# Altium PCB ExchangeDisplay.PcbDoc (part 3 of 3)
Units mil, origin at the board's own origin, x right, y up, seen from the top; angles counter-clockwise.
Board outline 17200 x 6515 mil, 2 copper layers (Top Layer, Bottom Layer); 256 components, 104 nets, 649 pads, 121 vias.
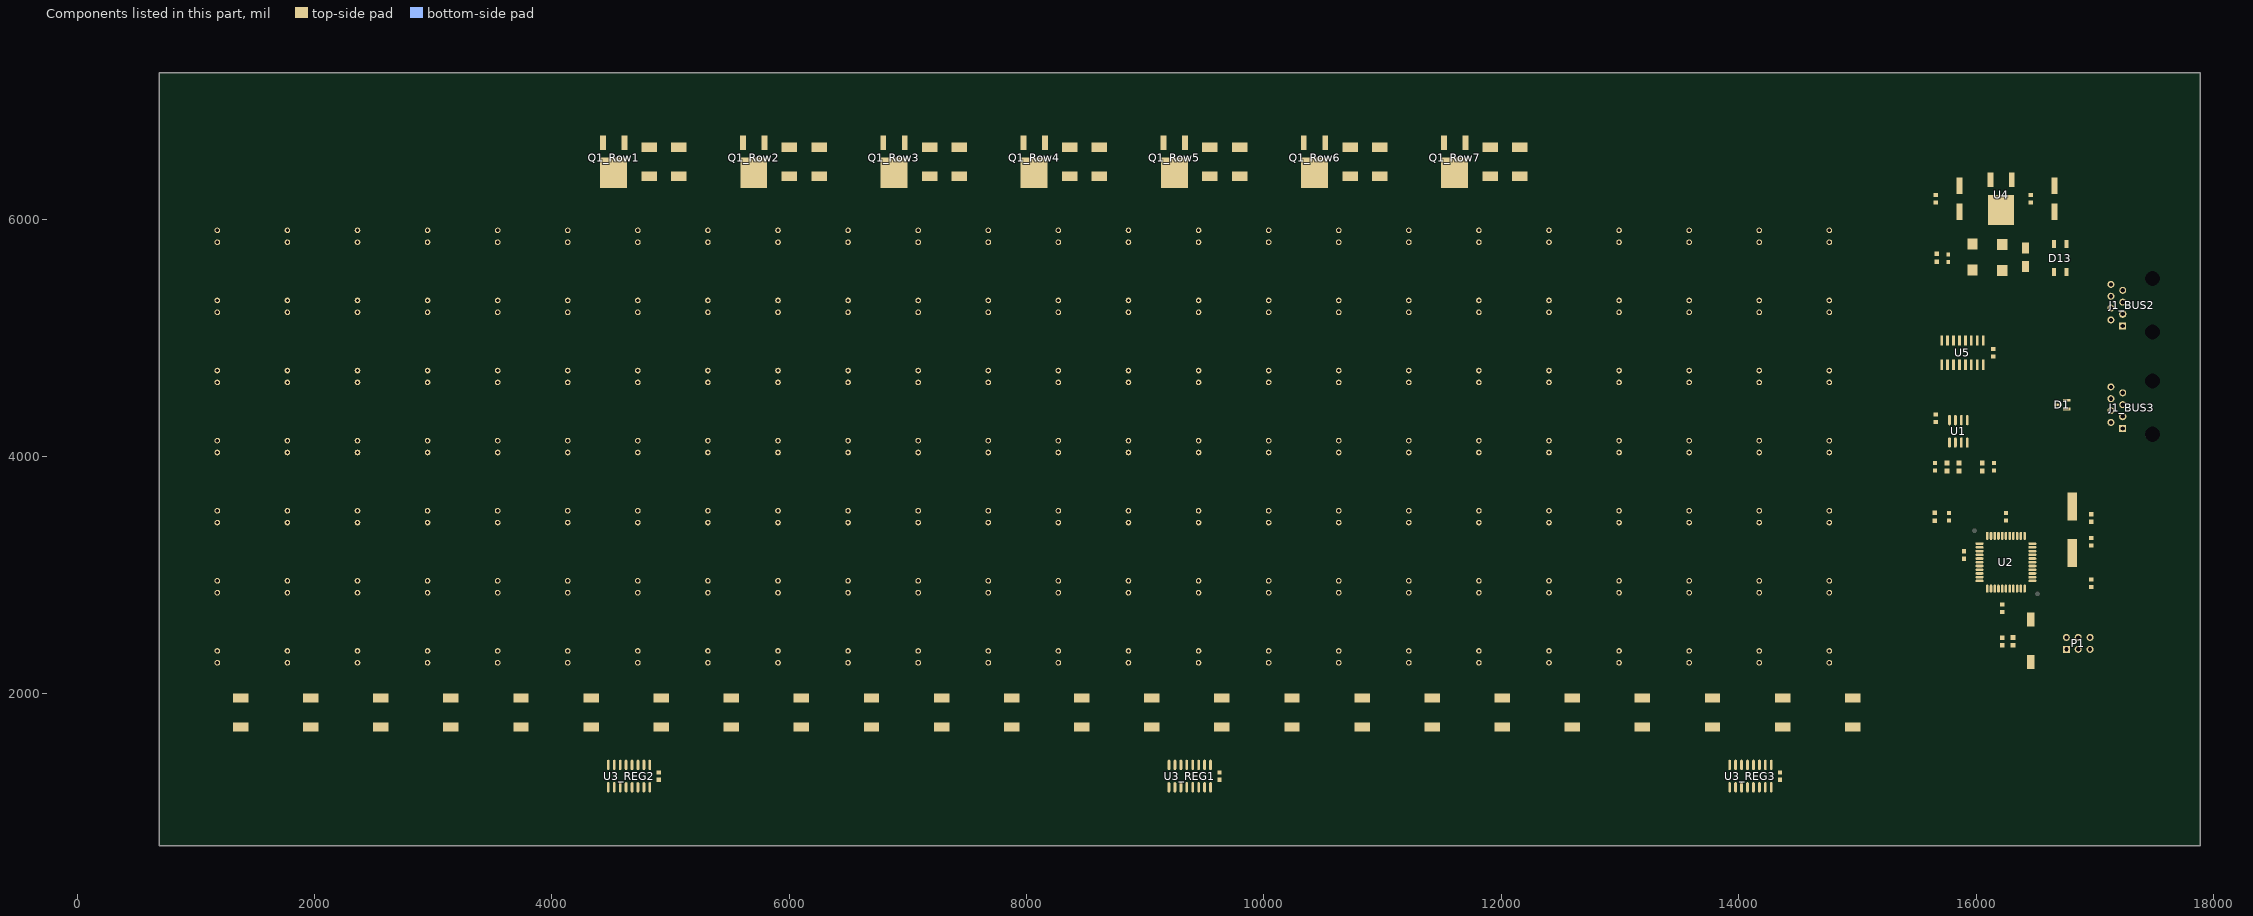
[diagram p3: the components of this part, seen from the top]

## Polygon pours and split planes (outlines as drawn) (continued)
RES07 on Top Layer "Top Layer-No Net" (solid, pour order 1000): 11340.08,4033.16 11340.08,4035.16 11442.08,4137.16 11442.08,3929.16
RES07 on Top Layer "Top Layer-No Net" (solid, pour order 1000): 11340.08,4623.71 11340.08,4625.71 11442.08,4727.71 11442.08,4519.71
RES07 on Top Layer "Top Layer-No Net" (solid, pour order 1000): 11340.08,5214.26 11340.08,5216.26 11442.08,5318.26 11442.08,5110.26
RES07 on Top Layer "Top Layer-No Net" (solid, pour order 1000): 11340.08,2852.06 11340.08,2854.06 11442.08,2956.06 11442.08,2748.06
RES08 on Top Layer "Top Layer-No Net" (solid, pour order 1000): 10749.53,2261.51 10749.53,2263.51 10851.53,2365.51 10851.53,2157.51
RES08 on Top Layer "Top Layer-No Net" (solid, pour order 1000): 10749.53,3442.61 10749.53,3444.61 10851.53,3546.61 10851.53,3338.61
RES08 on Top Layer "Top Layer-No Net" (solid, pour order 1000): 10749.53,4033.16 10749.53,4035.16 10851.53,4137.16 10851.53,3929.16
RES08 on Top Layer "Top Layer-No Net" (solid, pour order 1000): 10749.53,4623.71 10749.53,4625.71 10851.53,4727.71 10851.53,4519.71
RES08 on Top Layer "Top Layer-No Net" (solid, pour order 1000): 10749.53,5214.26 10749.53,5216.26 10851.53,5318.26 10851.53,5110.26
RES08 on Top Layer "Top Layer-No Net" (solid, pour order 1000): 10749.53,2852.06 10749.53,2854.06 10851.53,2956.06 10851.53,2748.06
RES21 on Top Layer "Top Layer-No Net" (solid, pour order 1000): 10158.98,2261.51 10158.98,2263.51 10260.98,2365.51 10260.98,2157.51
RES21 on Top Layer "Top Layer-No Net" (solid, pour order 1000): 10158.98,3442.61 10158.98,3444.61 10260.98,3546.61 10260.98,3338.61
RES21 on Top Layer "Top Layer-No Net" (solid, pour order 1000): 10158.98,4033.16 10158.98,4035.16 10260.98,4137.16 10260.98,3929.16
RES21 on Top Layer "Top Layer-No Net" (solid, pour order 1000): 10158.98,4623.71 10158.98,4625.71 10260.98,4727.71 10260.98,4519.71
RES21 on Top Layer "Top Layer-No Net" (solid, pour order 1000): 10158.98,5214.26 10158.98,5216.26 10260.98,5318.26 10260.98,5110.26
RES21 on Top Layer "Top Layer-No Net" (solid, pour order 1000): 10158.98,2852.06 10158.98,2854.06 10260.98,2956.06 10260.98,2748.06
RES22 on Top Layer "Top Layer-No Net" (solid, pour order 1000): 9568.43,2261.51 9568.43,2263.51 9670.43,2365.51 9670.43,2157.51
RES22 on Top Layer "Top Layer-No Net" (solid, pour order 1000): 9568.43,3442.61 9568.43,3444.61 9670.43,3546.61 9670.43,3338.61
RES22 on Top Layer "Top Layer-No Net" (solid, pour order 1000): 9568.43,4033.16 9568.43,4035.16 9670.43,4137.16 9670.43,3929.16
RES22 on Top Layer "Top Layer-No Net" (solid, pour order 1000): 9568.43,4623.71 9568.43,4625.71 9670.43,4727.71 9670.43,4519.71
RES22 on Top Layer "Top Layer-No Net" (solid, pour order 1000): 9568.43,5214.26 9568.43,5216.26 9670.43,5318.26 9670.43,5110.26
RES22 on Top Layer "Top Layer-No Net" (solid, pour order 1000): 9568.43,2852.06 9568.43,2854.06 9670.43,2956.06 9670.43,2748.06
RES23 on Top Layer "Top Layer-No Net" (solid, pour order 1000): 8977.88,2261.51 8977.88,2263.51 9079.88,2365.51 9079.88,2157.51
RES23 on Top Layer "Top Layer-No Net" (solid, pour order 1000): 8977.88,3442.61 8977.88,3444.61 9079.88,3546.61 9079.88,3338.61
RES23 on Top Layer "Top Layer-No Net" (solid, pour order 1000): 8977.88,4033.16 8977.88,4035.16 9079.88,4137.16 9079.88,3929.16
RES23 on Top Layer "Top Layer-No Net" (solid, pour order 1000): 8977.88,4623.71 8977.88,4625.71 9079.88,4727.71 9079.88,4519.71
RES23 on Top Layer "Top Layer-No Net" (solid, pour order 1000): 8977.88,5214.26 8977.88,5216.26 9079.88,5318.26 9079.88,5110.26
RES23 on Top Layer "Top Layer-No Net" (solid, pour order 1000): 8977.88,2852.06 8977.88,2854.06 9079.88,2956.06 9079.88,2748.06
RES24 on Top Layer "Top Layer-No Net" (solid, pour order 1000): 8387.33,2261.51 8387.33,2263.51 8489.33,2365.51 8489.33,2157.51
RES24 on Top Layer "Top Layer-No Net" (solid, pour order 1000): 8387.33,3442.61 8387.33,3444.61 8489.33,3546.61 8489.33,3338.61
RES24 on Top Layer "Top Layer-No Net" (solid, pour order 1000): 8387.33,4033.16 8387.33,4035.16 8489.33,4137.16 8489.33,3929.16
RES24 on Top Layer "Top Layer-No Net" (solid, pour order 1000): 8387.33,4623.71 8387.33,4625.71 8489.33,4727.71 8489.33,4519.71
RES24 on Top Layer "Top Layer-No Net" (solid, pour order 1000): 8387.33,5214.26 8387.33,5216.26 8489.33,5318.26 8489.33,5110.26
RES24 on Top Layer "Top Layer-No Net" (solid, pour order 1000): 8387.33,2852.06 8387.33,2854.06 8489.33,2956.06 8489.33,2748.06
RES25 on Top Layer "Top Layer-No Net" (solid, pour order 1000): 7796.78,2261.51 7796.78,2263.51 7898.78,2365.51 7898.78,2157.51
RES25 on Top Layer "Top Layer-No Net" (solid, pour order 1000): 7796.78,3442.61 7796.78,3444.61 7898.78,3546.61 7898.78,3338.61
RES25 on Top Layer "Top Layer-No Net" (solid, pour order 1000): 7796.78,4033.16 7796.78,4035.16 7898.78,4137.16 7898.78,3929.16
RES25 on Top Layer "Top Layer-No Net" (solid, pour order 1000): 7796.78,4623.71 7796.78,4625.71 7898.78,4727.71 7898.78,4519.71
RES25 on Top Layer "Top Layer-No Net" (solid, pour order 1000): 7796.78,5214.26 7796.78,5216.26 7898.78,5318.26 7898.78,5110.26
RES25 on Top Layer "Top Layer-No Net" (solid, pour order 1000): 7796.78,2852.06 7796.78,2854.06 7898.78,2956.06 7898.78,2748.06
RES26 on Top Layer "Top Layer-No Net" (solid, pour order 1000): 7206.22,2261.51 7206.22,2263.51 7308.22,2365.51 7308.22,2157.51
RES26 on Top Layer "Top Layer-No Net" (solid, pour order 1000): 7206.22,3442.61 7206.22,3444.61 7308.22,3546.61 7308.22,3338.61
RES26 on Top Layer "Top Layer-No Net" (solid, pour order 1000): 7206.22,4033.16 7206.22,4035.16 7308.22,4137.16 7308.22,3929.16
RES26 on Top Layer "Top Layer-No Net" (solid, pour order 1000): 7206.22,4623.71 7206.22,4625.71 7308.22,4727.71 7308.22,4519.71
RES26 on Top Layer "Top Layer-No Net" (solid, pour order 1000): 7206.22,5214.26 7206.22,5216.26 7308.22,5318.26 7308.22,5110.26
RES26 on Top Layer "Top Layer-No Net" (solid, pour order 1000): 7206.22,2852.06 7206.22,2854.06 7308.22,2956.06 7308.22,2748.06
RES27 on Top Layer "Top Layer-No Net" (solid, pour order 1000): 6615.67,2261.51 6615.67,2263.51 6717.67,2365.51 6717.67,2157.51
RES27 on Top Layer "Top Layer-No Net" (solid, pour order 1000): 6615.67,3442.61 6615.67,3444.61 6717.67,3546.61 6717.67,3338.61
RES27 on Top Layer "Top Layer-No Net" (solid, pour order 1000): 6615.67,4033.16 6615.67,4035.16 6717.67,4137.16 6717.67,3929.16
RES27 on Top Layer "Top Layer-No Net" (solid, pour order 1000): 6615.67,4623.71 6615.67,4625.71 6717.67,4727.71 6717.67,4519.71
RES27 on Top Layer "Top Layer-No Net" (solid, pour order 1000): 6615.67,5214.26 6615.67,5216.26 6717.67,5318.26 6717.67,5110.26
RES27 on Top Layer "Top Layer-No Net" (solid, pour order 1000): 6615.67,2852.06 6615.67,2854.06 6717.67,2956.06 6717.67,2748.06
RES28 on Top Layer "Top Layer-No Net" (solid, pour order 1000): 6025.12,2261.51 6025.12,2263.51 6127.12,2365.51 6127.12,2157.51
RES28 on Top Layer "Top Layer-No Net" (solid, pour order 1000): 6025.12,3442.61 6025.12,3444.61 6127.12,3546.61 6127.12,3338.61
RES28 on Top Layer "Top Layer-No Net" (solid, pour order 1000): 6025.12,4033.16 6025.12,4035.16 6127.12,4137.16 6127.12,3929.16
RES28 on Top Layer "Top Layer-No Net" (solid, pour order 1000): 6025.12,4623.71 6025.12,4625.71 6127.12,4727.71 6127.12,4519.71
RES28 on Top Layer "Top Layer-No Net" (solid, pour order 1000): 6025.12,5214.26 6025.12,5216.26 6127.12,5318.26 6127.12,5110.26
RES28 on Top Layer "Top Layer-No Net" (solid, pour order 1000): 6025.12,2852.06 6025.12,2854.06 6127.12,2956.06 6127.12,2748.06
RES11 on Top Layer "Top Layer-No Net" (solid, pour order 1000): 5434.57,2261.51 5434.57,2263.51 5536.57,2365.51 5536.57,2157.51
RES11 on Top Layer "Top Layer-No Net" (solid, pour order 1000): 5434.57,3442.61 5434.57,3444.61 5536.57,3546.61 5536.57,3338.61
RES11 on Top Layer "Top Layer-No Net" (solid, pour order 1000): 5434.57,4033.16 5434.57,4035.16 5536.57,4137.16 5536.57,3929.16
RES11 on Top Layer "Top Layer-No Net" (solid, pour order 1000): 5434.57,4623.71 5434.57,4625.71 5536.57,4727.71 5536.57,4519.71
RES11 on Top Layer "Top Layer-No Net" (solid, pour order 1000): 5434.57,5214.26 5434.57,5216.26 5536.57,5318.26 5536.57,5110.26
RES11 on Top Layer "Top Layer-No Net" (solid, pour order 1000): 5434.57,2852.06 5434.57,2854.06 5536.57,2956.06 5536.57,2748.06
RES12 on Top Layer "Top Layer-No Net" (solid, pour order 1000): 4844.02,2261.51 4844.02,2263.51 4946.02,2365.51 4946.02,2157.51
RES12 on Top Layer "Top Layer-No Net" (solid, pour order 1000): 4844.02,3442.61 4844.02,3444.61 4946.02,3546.61 4946.02,3338.61
RES12 on Top Layer "Top Layer-No Net" (solid, pour order 1000): 4844.02,4033.16 4844.02,4035.16 4946.02,4137.16 4946.02,3929.16
RES12 on Top Layer "Top Layer-No Net" (solid, pour order 1000): 4844.02,4623.71 4844.02,4625.71 4946.02,4727.71 4946.02,4519.71
RES12 on Top Layer "Top Layer-No Net" (solid, pour order 1000): 4844.02,5214.26 4844.02,5216.26 4946.02,5318.26 4946.02,5110.26
RES12 on Top Layer "Top Layer-No Net" (solid, pour order 1000): 4844.02,2852.06 4844.02,2854.06 4946.02,2956.06 4946.02,2748.06
RES13 on Top Layer "Top Layer-No Net" (solid, pour order 1000): 4253.47,2261.51 4253.47,2263.51 4355.47,2365.51 4355.47,2157.51
RES13 on Top Layer "Top Layer-No Net" (solid, pour order 1000): 4253.47,3442.61 4253.47,3444.61 4355.47,3546.61 4355.47,3338.61
RES13 on Top Layer "Top Layer-No Net" (solid, pour order 1000): 4253.47,4033.16 4253.47,4035.16 4355.47,4137.16 4355.47,3929.16
RES13 on Top Layer "Top Layer-No Net" (solid, pour order 1000): 4253.47,4623.71 4253.47,4625.71 4355.47,4727.71 4355.47,4519.71
RES13 on Top Layer "Top Layer-No Net" (solid, pour order 1000): 4253.47,5214.26 4253.47,5216.26 4355.47,5318.26 4355.47,5110.26
RES13 on Top Layer "Top Layer-No Net" (solid, pour order 1000): 4253.47,2852.06 4253.47,2854.06 4355.47,2956.06 4355.47,2748.06
RES14 on Top Layer "Top Layer-No Net" (solid, pour order 1000): 3662.92,2261.51 3662.92,2263.51 3764.92,2365.51 3764.92,2157.51
RES14 on Top Layer "Top Layer-No Net" (solid, pour order 1000): 3662.92,3442.61 3662.92,3444.61 3764.92,3546.61 3764.92,3338.61
RES14 on Top Layer "Top Layer-No Net" (solid, pour order 1000): 3662.92,4033.16 3662.92,4035.16 3764.92,4137.16 3764.92,3929.16
RES14 on Top Layer "Top Layer-No Net" (solid, pour order 1000): 3662.92,4623.71 3662.92,4625.71 3764.92,4727.71 3764.92,4519.71
RES14 on Top Layer "Top Layer-No Net" (solid, pour order 1000): 3662.92,5214.26 3662.92,5216.26 3764.92,5318.26 3764.92,5110.26
RES14 on Top Layer "Top Layer-No Net" (solid, pour order 1000): 3662.92,2852.06 3662.92,2854.06 3764.92,2956.06 3764.92,2748.06
RES15 on Top Layer "Top Layer-No Net" (solid, pour order 1000): 3072.37,2261.51 3072.37,2263.51 3174.37,2365.51 3174.37,2157.51
RES15 on Top Layer "Top Layer-No Net" (solid, pour order 1000): 3072.37,3442.61 3072.37,3444.61 3174.37,3546.61 3174.37,3338.61
RES15 on Top Layer "Top Layer-No Net" (solid, pour order 1000): 3072.37,4033.16 3072.37,4035.16 3174.37,4137.16 3174.37,3929.16
RES15 on Top Layer "Top Layer-No Net" (solid, pour order 1000): 3072.37,4623.71 3072.37,4625.71 3174.37,4727.71 3174.37,4519.71
RES15 on Top Layer "Top Layer-No Net" (solid, pour order 1000): 3072.37,5214.26 3072.37,5216.26 3174.37,5318.26 3174.37,5110.26
RES15 on Top Layer "Top Layer-No Net" (solid, pour order 1000): 3072.37,2852.06 3072.37,2854.06 3174.37,2956.06 3174.37,2748.06
RES16 on Top Layer "Top Layer-No Net" (solid, pour order 1000): 2481.82,2261.51 2481.82,2263.51 2583.82,2365.51 2583.82,2157.51
RES16 on Top Layer "Top Layer-No Net" (solid, pour order 1000): 2481.82,3442.61 2481.82,3444.61 2583.82,3546.61 2583.82,3338.61
RES16 on Top Layer "Top Layer-No Net" (solid, pour order 1000): 2481.82,4033.16 2481.82,4035.16 2583.82,4137.16 2583.82,3929.16
RES16 on Top Layer "Top Layer-No Net" (solid, pour order 1000): 2481.82,4623.71 2481.82,4625.71 2583.82,4727.71 2583.82,4519.71
RES16 on Top Layer "Top Layer-No Net" (solid, pour order 1000): 2481.82,5214.26 2481.82,5216.26 2583.82,5318.26 2583.82,5110.26
RES16 on Top Layer "Top Layer-No Net" (solid, pour order 1000): 2481.82,2852.06 2481.82,2854.06 2583.82,2956.06 2583.82,2748.06
RES17 on Top Layer "Top Layer-No Net" (solid, pour order 1000): 1891.26,2261.51 1891.26,2263.51 1993.26,2365.51 1993.26,2157.51
RES17 on Top Layer "Top Layer-No Net" (solid, pour order 1000): 1891.26,3442.61 1891.26,3444.61 1993.26,3546.61 1993.26,3338.61
RES17 on Top Layer "Top Layer-No Net" (solid, pour order 1000): 1891.26,4033.16 1891.26,4035.16 1993.26,4137.16 1993.26,3929.16
RES17 on Top Layer "Top Layer-No Net" (solid, pour order 1000): 1891.26,4623.71 1891.26,4625.71 1993.26,4727.71 1993.26,4519.71
RES17 on Top Layer "Top Layer-No Net" (solid, pour order 1000): 1891.26,5214.26 1891.26,5216.26 1993.26,5318.26 1993.26,5110.26
RES17 on Top Layer "Top Layer-No Net" (solid, pour order 1000): 1891.26,2852.06 1891.26,2854.06 1993.26,2956.06 1993.26,2748.06
RES18 on Top Layer "Top Layer-No Net" (solid, pour order 1000): 1300.71,2852.06 1300.71,2854.06 1402.71,2956.06 1402.71,2748.06
RES18 on Top Layer "Top Layer-No Net" (solid, pour order 1000): 1300.71,5214.26 1300.71,5216.26 1402.71,5318.26 1402.71,5110.26
RES18 on Top Layer "Top Layer-No Net" (solid, pour order 1000): 1300.71,4623.71 1300.71,4625.71 1402.71,4727.71 1402.71,4519.71
RES18 on Top Layer "Top Layer-No Net" (solid, pour order 1000): 1300.71,4033.16 1300.71,4035.16 1402.71,4137.16 1402.71,3929.16
RES18 on Top Layer "Top Layer-No Net" (solid, pour order 1000): 1300.71,3442.61 1300.71,3444.61 1402.71,3546.61 1402.71,3338.61
RES18 on Top Layer "Top Layer-No Net" (solid, pour order 1000): 1300.71,2261.51 1300.71,2263.51 1402.71,2365.51 1402.71,2157.51
GND on Bottom Layer "Top Layer-No Net" (solid): 17890,7235 17890,720 690,720 690,7235
VCC on Bottom Layer "Top Layer-No Net" (solid): 5780.18,2081 5805.18,2106 5805.18,2156 5780.18,2181 5630.18,2181 5605.18,2156 5605.18,2106 5630.18,2081
VCC on Bottom Layer "Top Layer-No Net" (solid): 10504.59,2081 10529.59,2106 10529.59,2156 10504.59,2181 10354.59,2181 10329.59,2156 10329.59,2106 10354.59,2081
VCC on Bottom Layer "Top Layer-No Net" (solid): 15229,2081 15254,2106 15254,2156 15229,2181 15079,2181 15054,2156 15054,2106 15079,2081
OUT_Row1 on Bottom Layer "Top Layer-No Net" (solid): 4445.39,2607.69 4420.39,2582.69 4420.39,2532.69 4445.39,2507.69 4595.39,2507.69 4620.39,2532.69 4620.39,2582.69 4595.39,2607.69
OUT_Row2 on Bottom Layer "Top Layer-No Net" (solid): 5626.49,3198.24 5601.49,3173.24 5601.49,3123.24 5626.49,3098.24 5776.49,3098.24 5801.49,3123.24 5801.49,3173.24 5776.49,3198.24
OUT_Row3 on Bottom Layer "Top Layer-No Net" (solid): 6807.59,3788.8 6782.59,3763.8 6782.59,3713.8 6807.59,3688.8 6957.59,3688.8 6982.59,3713.8 6982.59,3763.8 6957.59,3788.8
OUT_Row4 on Bottom Layer "Top Layer-No Net" (solid): 7988.69,4379.35 7963.69,4354.35 7963.69,4304.35 7988.69,4279.35 8138.69,4279.35 8163.69,4304.35 8163.69,4354.35 8138.69,4379.35
OUT_Row5 on Bottom Layer "Top Layer-No Net" (solid): 9169.8,4969.9 9144.8,4944.9 9144.8,4894.9 9169.8,4869.9 9319.8,4869.9 9344.8,4894.9 9344.8,4944.9 9319.8,4969.9
OUT_Row6 on Bottom Layer "Top Layer-No Net" (solid): 10350.9,5559.45 10325.9,5534.45 10325.9,5484.45 10350.9,5459.45 10500.9,5459.45 10525.9,5484.45 10525.9,5534.45 10500.9,5559.45
OUT_Row7 on Bottom Layer "Top Layer-No Net" (solid): 11532,6151 11507,6126 11507,6076 11532,6051 11682,6051 11707,6076 11707,6126 11682,6151
OUT_Row1 on Bottom Layer "Top Layer-No Net" (solid, pour order 1000): 1772.35,2481.82 1770.35,2481.82 1668.35,2583.82 1876.35,2583.82
OUT_Row1 on Bottom Layer "Top Layer-No Net" (solid, pour order 1000): 2362.9,2481.82 2360.9,2481.82 2258.9,2583.82 2466.9,2583.82
OUT_Row1 on Bottom Layer "Top Layer-No Net" (solid, pour order 1000): 2953.45,2481.82 2951.45,2481.82 2849.45,2583.82 3057.45,2583.82
OUT_Row1 on Bottom Layer "Top Layer-No Net" (solid, pour order 1000): 3544,2481.82 3542,2481.82 3440,2583.82 3648,2583.82
OUT_Row1 on Bottom Layer "Top Layer-No Net" (solid, pour order 1000): 4134.55,2481.82 4132.55,2481.82 4030.55,2583.82 4238.55,2583.82
OUT_Row1 on Bottom Layer "Top Layer-No Net" (solid, pour order 1000): 4725.1,2481.82 4723.1,2481.82 4621.1,2583.82 4829.1,2583.82
OUT_Row1 on Bottom Layer "Top Layer-No Net" (solid, pour order 1000): 5315.66,2481.82 5313.66,2481.82 5211.66,2583.82 5419.66,2583.82
OUT_Row1 on Bottom Layer "Top Layer-No Net" (solid, pour order 1000): 5906.21,2481.82 5904.21,2481.82 5802.21,2583.82 6010.21,2583.82
OUT_Row1 on Bottom Layer "Top Layer-No Net" (solid, pour order 1000): 6496.76,2481.82 6494.76,2481.82 6392.76,2583.82 6600.76,2583.82
OUT_Row1 on Bottom Layer "Top Layer-No Net" (solid, pour order 1000): 7087.31,2481.82 7085.31,2481.82 6983.31,2583.82 7191.31,2583.82
OUT_Row1 on Bottom Layer "Top Layer-No Net" (solid, pour order 1000): 7677.86,2481.82 7675.86,2481.82 7573.86,2583.82 7781.86,2583.82
OUT_Row1 on Bottom Layer "Top Layer-No Net" (solid, pour order 1000): 8268.41,2481.82 8266.41,2481.82 8164.41,2583.82 8372.41,2583.82
OUT_Row1 on Bottom Layer "Top Layer-No Net" (solid, pour order 1000): 8858.96,2481.82 8856.96,2481.82 8754.96,2583.82 8962.96,2583.82
OUT_Row1 on Bottom Layer "Top Layer-No Net" (solid, pour order 1000): 9449.51,2481.82 9447.51,2481.82 9345.51,2583.82 9553.51,2583.82
OUT_Row1 on Bottom Layer "Top Layer-No Net" (solid, pour order 1000): 10040.07,2481.82 10038.07,2481.82 9936.07,2583.82 10144.07,2583.82
OUT_Row1 on Bottom Layer "Top Layer-No Net" (solid, pour order 1000): 10630.62,2481.82 10628.62,2481.82 10526.62,2583.82 10734.62,2583.82
OUT_Row1 on Bottom Layer "Top Layer-No Net" (solid, pour order 1000): 11221.17,2481.82 11219.17,2481.82 11117.17,2583.82 11325.17,2583.82
OUT_Row1 on Bottom Layer "Top Layer-No Net" (solid, pour order 1000): 11811.72,2481.82 11809.72,2481.82 11707.72,2583.82 11915.72,2583.82
OUT_Row1 on Bottom Layer "Top Layer-No Net" (solid, pour order 1000): 12402.27,2481.82 12400.27,2481.82 12298.27,2583.82 12506.27,2583.82
OUT_Row1 on Bottom Layer "Top Layer-No Net" (solid, pour order 1000): 12992.82,2481.82 12990.82,2481.82 12888.82,2583.82 13096.82,2583.82
OUT_Row1 on Bottom Layer "Top Layer-No Net" (solid, pour order 1000): 13583.37,2481.82 13581.37,2481.82 13479.37,2583.82 13687.37,2583.82
OUT_Row1 on Bottom Layer "Top Layer-No Net" (solid, pour order 1000): 14173.92,2481.82 14171.92,2481.82 14069.92,2583.82 14277.92,2583.82
OUT_Row1 on Bottom Layer "Top Layer-No Net" (solid, pour order 1000): 14764.47,2481.82 14762.47,2481.82 14660.47,2583.82 14868.47,2583.82
OUT_Row2 on Bottom Layer "Top Layer-No Net" (solid, pour order 1000): 1772.35,3072.37 1770.35,3072.37 1668.35,3174.37 1876.35,3174.37
OUT_Row2 on Bottom Layer "Top Layer-No Net" (solid, pour order 1000): 2362.9,3072.37 2360.9,3072.37 2258.9,3174.37 2466.9,3174.37
OUT_Row2 on Bottom Layer "Top Layer-No Net" (solid, pour order 1000): 2953.45,3072.37 2951.45,3072.37 2849.45,3174.37 3057.45,3174.37
OUT_Row2 on Bottom Layer "Top Layer-No Net" (solid, pour order 1000): 3544,3072.37 3542,3072.37 3440,3174.37 3648,3174.37
OUT_Row2 on Bottom Layer "Top Layer-No Net" (solid, pour order 1000): 4134.55,3072.37 4132.55,3072.37 4030.55,3174.37 4238.55,3174.37
OUT_Row2 on Bottom Layer "Top Layer-No Net" (solid, pour order 1000): 4725.1,3072.37 4723.1,3072.37 4621.1,3174.37 4829.1,3174.37
OUT_Row2 on Bottom Layer "Top Layer-No Net" (solid, pour order 1000): 5315.66,3072.37 5313.66,3072.37 5211.66,3174.37 5419.66,3174.37
OUT_Row2 on Bottom Layer "Top Layer-No Net" (solid, pour order 1000): 5906.21,3072.37 5904.21,3072.37 5802.21,3174.37 6010.21,3174.37
OUT_Row2 on Bottom Layer "Top Layer-No Net" (solid, pour order 1000): 6496.76,3072.37 6494.76,3072.37 6392.76,3174.37 6600.76,3174.37
OUT_Row2 on Bottom Layer "Top Layer-No Net" (solid, pour order 1000): 7087.31,3072.37 7085.31,3072.37 6983.31,3174.37 7191.31,3174.37
OUT_Row2 on Bottom Layer "Top Layer-No Net" (solid, pour order 1000): 7677.86,3072.37 7675.86,3072.37 7573.86,3174.37 7781.86,3174.37
OUT_Row2 on Bottom Layer "Top Layer-No Net" (solid, pour order 1000): 8268.41,3072.37 8266.41,3072.37 8164.41,3174.37 8372.41,3174.37
OUT_Row2 on Bottom Layer "Top Layer-No Net" (solid, pour order 1000): 8858.96,3072.37 8856.96,3072.37 8754.96,3174.37 8962.96,3174.37
OUT_Row2 on Bottom Layer "Top Layer-No Net" (solid, pour order 1000): 9449.51,3072.37 9447.51,3072.37 9345.51,3174.37 9553.51,3174.37
OUT_Row2 on Bottom Layer "Top Layer-No Net" (solid, pour order 1000): 10040.07,3072.37 10038.07,3072.37 9936.07,3174.37 10144.07,3174.37
OUT_Row2 on Bottom Layer "Top Layer-No Net" (solid, pour order 1000): 10630.62,3072.37 10628.62,3072.37 10526.62,3174.37 10734.62,3174.37
OUT_Row2 on Bottom Layer "Top Layer-No Net" (solid, pour order 1000): 11221.17,3072.37 11219.17,3072.37 11117.17,3174.37 11325.17,3174.37
OUT_Row2 on Bottom Layer "Top Layer-No Net" (solid, pour order 1000): 11811.72,3072.37 11809.72,3072.37 11707.72,3174.37 11915.72,3174.37
OUT_Row2 on Bottom Layer "Top Layer-No Net" (solid, pour order 1000): 12402.27,3072.37 12400.27,3072.37 12298.27,3174.37 12506.27,3174.37
OUT_Row2 on Bottom Layer "Top Layer-No Net" (solid, pour order 1000): 12992.82,3072.37 12990.82,3072.37 12888.82,3174.37 13096.82,3174.37
OUT_Row2 on Bottom Layer "Top Layer-No Net" (solid, pour order 1000): 13583.37,3072.37 13581.37,3072.37 13479.37,3174.37 13687.37,3174.37
OUT_Row2 on Bottom Layer "Top Layer-No Net" (solid, pour order 1000): 14173.92,3072.37 14171.92,3072.37 14069.92,3174.37 14277.92,3174.37
OUT_Row2 on Bottom Layer "Top Layer-No Net" (solid, pour order 1000): 14764.47,3072.37 14762.47,3072.37 14660.47,3174.37 14868.47,3174.37
OUT_Row3 on Bottom Layer "Top Layer-No Net" (solid, pour order 1000): 1772.35,3662.92 1770.35,3662.92 1668.35,3764.92 1876.35,3764.92
OUT_Row3 on Bottom Layer "Top Layer-No Net" (solid, pour order 1000): 2362.9,3662.92 2360.9,3662.92 2258.9,3764.92 2466.9,3764.92
OUT_Row3 on Bottom Layer "Top Layer-No Net" (solid, pour order 1000): 2953.45,3662.92 2951.45,3662.92 2849.45,3764.92 3057.45,3764.92
OUT_Row3 on Bottom Layer "Top Layer-No Net" (solid, pour order 1000): 3544,3662.92 3542,3662.92 3440,3764.92 3648,3764.92
OUT_Row3 on Bottom Layer "Top Layer-No Net" (solid, pour order 1000): 4134.55,3662.92 4132.55,3662.92 4030.55,3764.92 4238.55,3764.92
OUT_Row3 on Bottom Layer "Top Layer-No Net" (solid, pour order 1000): 4725.1,3662.92 4723.1,3662.92 4621.1,3764.92 4829.1,3764.92
OUT_Row3 on Bottom Layer "Top Layer-No Net" (solid, pour order 1000): 5315.66,3662.92 5313.66,3662.92 5211.66,3764.92 5419.66,3764.92
OUT_Row3 on Bottom Layer "Top Layer-No Net" (solid, pour order 1000): 5906.21,3662.92 5904.21,3662.92 5802.21,3764.92 6010.21,3764.92
OUT_Row3 on Bottom Layer "Top Layer-No Net" (solid, pour order 1000): 6496.76,3662.92 6494.76,3662.92 6392.76,3764.92 6600.76,3764.92
OUT_Row3 on Bottom Layer "Top Layer-No Net" (solid, pour order 1000): 7087.31,3662.92 7085.31,3662.92 6983.31,3764.92 7191.31,3764.92
OUT_Row3 on Bottom Layer "Top Layer-No Net" (solid, pour order 1000): 7677.86,3662.92 7675.86,3662.92 7573.86,3764.92 7781.86,3764.92
OUT_Row3 on Bottom Layer "Top Layer-No Net" (solid, pour order 1000): 8268.41,3662.92 8266.41,3662.92 8164.41,3764.92 8372.41,3764.92
OUT_Row3 on Bottom Layer "Top Layer-No Net" (solid, pour order 1000): 8858.96,3662.92 8856.96,3662.92 8754.96,3764.92 8962.96,3764.92
OUT_Row3 on Bottom Layer "Top Layer-No Net" (solid, pour order 1000): 9449.51,3662.92 9447.51,3662.92 9345.51,3764.92 9553.51,3764.92
OUT_Row3 on Bottom Layer "Top Layer-No Net" (solid, pour order 1000): 10040.07,3662.92 10038.07,3662.92 9936.07,3764.92 10144.07,3764.92
OUT_Row3 on Bottom Layer "Top Layer-No Net" (solid, pour order 1000): 10630.62,3662.92 10628.62,3662.92 10526.62,3764.92 10734.62,3764.92
OUT_Row3 on Bottom Layer "Top Layer-No Net" (solid, pour order 1000): 11221.17,3662.92 11219.17,3662.92 11117.17,3764.92 11325.17,3764.92
OUT_Row3 on Bottom Layer "Top Layer-No Net" (solid, pour order 1000): 11811.72,3662.92 11809.72,3662.92 11707.72,3764.92 11915.72,3764.92
OUT_Row3 on Bottom Layer "Top Layer-No Net" (solid, pour order 1000): 12402.27,3662.92 12400.27,3662.92 12298.27,3764.92 12506.27,3764.92
OUT_Row3 on Bottom Layer "Top Layer-No Net" (solid, pour order 1000): 12992.82,3662.92 12990.82,3662.92 12888.82,3764.92 13096.82,3764.92
OUT_Row3 on Bottom Layer "Top Layer-No Net" (solid, pour order 1000): 13583.37,3662.92 13581.37,3662.92 13479.37,3764.92 13687.37,3764.92
OUT_Row3 on Bottom Layer "Top Layer-No Net" (solid, pour order 1000): 14173.92,3662.92 14171.92,3662.92 14069.92,3764.92 14277.92,3764.92
OUT_Row3 on Bottom Layer "Top Layer-No Net" (solid, pour order 1000): 14764.47,3662.92 14762.47,3662.92 14660.47,3764.92 14868.47,3764.92
OUT_Row4 on Bottom Layer "Top Layer-No Net" (solid, pour order 1000): 1772.35,4253.47 1770.35,4253.47 1668.35,4355.47 1876.35,4355.47
OUT_Row4 on Bottom Layer "Top Layer-No Net" (solid, pour order 1000): 2362.9,4253.47 2360.9,4253.47 2258.9,4355.47 2466.9,4355.47
OUT_Row4 on Bottom Layer "Top Layer-No Net" (solid, pour order 1000): 2953.45,4253.47 2951.45,4253.47 2849.45,4355.47 3057.45,4355.47
OUT_Row4 on Bottom Layer "Top Layer-No Net" (solid, pour order 1000): 3544,4253.47 3542,4253.47 3440,4355.47 3648,4355.47
OUT_Row4 on Bottom Layer "Top Layer-No Net" (solid, pour order 1000): 4134.55,4253.47 4132.55,4253.47 4030.55,4355.47 4238.55,4355.47
OUT_Row4 on Bottom Layer "Top Layer-No Net" (solid, pour order 1000): 4725.1,4253.47 4723.1,4253.47 4621.1,4355.47 4829.1,4355.47
OUT_Row4 on Bottom Layer "Top Layer-No Net" (solid, pour order 1000): 5315.66,4253.47 5313.66,4253.47 5211.66,4355.47 5419.66,4355.47
OUT_Row4 on Bottom Layer "Top Layer-No Net" (solid, pour order 1000): 5906.21,4253.47 5904.21,4253.47 5802.21,4355.47 6010.21,4355.47
OUT_Row4 on Bottom Layer "Top Layer-No Net" (solid, pour order 1000): 6496.76,4253.47 6494.76,4253.47 6392.76,4355.47 6600.76,4355.47
OUT_Row4 on Bottom Layer "Top Layer-No Net" (solid, pour order 1000): 7087.31,4253.47 7085.31,4253.47 6983.31,4355.47 7191.31,4355.47
OUT_Row4 on Bottom Layer "Top Layer-No Net" (solid, pour order 1000): 7677.86,4253.47 7675.86,4253.47 7573.86,4355.47 7781.86,4355.47
OUT_Row4 on Bottom Layer "Top Layer-No Net" (solid, pour order 1000): 8268.41,4253.47 8266.41,4253.47 8164.41,4355.47 8372.41,4355.47
OUT_Row4 on Bottom Layer "Top Layer-No Net" (solid, pour order 1000): 8858.96,4253.47 8856.96,4253.47 8754.96,4355.47 8962.96,4355.47
OUT_Row4 on Bottom Layer "Top Layer-No Net" (solid, pour order 1000): 9449.51,4253.47 9447.51,4253.47 9345.51,4355.47 9553.51,4355.47
OUT_Row4 on Bottom Layer "Top Layer-No Net" (solid, pour order 1000): 10040.07,4253.47 10038.07,4253.47 9936.07,4355.47 10144.07,4355.47
OUT_Row4 on Bottom Layer "Top Layer-No Net" (solid, pour order 1000): 10630.62,4253.47 10628.62,4253.47 10526.62,4355.47 10734.62,4355.47
OUT_Row4 on Bottom Layer "Top Layer-No Net" (solid, pour order 1000): 11221.17,4253.47 11219.17,4253.47 11117.17,4355.47 11325.17,4355.47
OUT_Row4 on Bottom Layer "Top Layer-No Net" (solid, pour order 1000): 11811.72,4253.47 11809.72,4253.47 11707.72,4355.47 11915.72,4355.47
OUT_Row4 on Bottom Layer "Top Layer-No Net" (solid, pour order 1000): 12402.27,4253.47 12400.27,4253.47 12298.27,4355.47 12506.27,4355.47
OUT_Row4 on Bottom Layer "Top Layer-No Net" (solid, pour order 1000): 12992.82,4253.47 12990.82,4253.47 12888.82,4355.47 13096.82,4355.47
OUT_Row4 on Bottom Layer "Top Layer-No Net" (solid, pour order 1000): 13583.37,4253.47 13581.37,4253.47 13479.37,4355.47 13687.37,4355.47
OUT_Row4 on Bottom Layer "Top Layer-No Net" (solid, pour order 1000): 14173.92,4253.47 14171.92,4253.47 14069.92,4355.47 14277.92,4355.47
OUT_Row4 on Bottom Layer "Top Layer-No Net" (solid, pour order 1000): 14764.47,4253.47 14762.47,4253.47 14660.47,4355.47 14868.47,4355.47
OUT_Row5 on Bottom Layer "Top Layer-No Net" (solid, pour order 1000): 1772.35,4844.02 1770.35,4844.02 1668.35,4946.02 1876.35,4946.02
OUT_Row5 on Bottom Layer "Top Layer-No Net" (solid, pour order 1000): 2362.9,4844.02 2360.9,4844.02 2258.9,4946.02 2466.9,4946.02
OUT_Row5 on Bottom Layer "Top Layer-No Net" (solid, pour order 1000): 2953.45,4844.02 2951.45,4844.02 2849.45,4946.02 3057.45,4946.02
OUT_Row5 on Bottom Layer "Top Layer-No Net" (solid, pour order 1000): 3544,4844.02 3542,4844.02 3440,4946.02 3648,4946.02
OUT_Row5 on Bottom Layer "Top Layer-No Net" (solid, pour order 1000): 4134.55,4844.02 4132.55,4844.02 4030.55,4946.02 4238.55,4946.02
OUT_Row5 on Bottom Layer "Top Layer-No Net" (solid, pour order 1000): 4725.1,4844.02 4723.1,4844.02 4621.1,4946.02 4829.1,4946.02
OUT_Row5 on Bottom Layer "Top Layer-No Net" (solid, pour order 1000): 5315.66,4844.02 5313.66,4844.02 5211.66,4946.02 5419.66,4946.02
OUT_Row5 on Bottom Layer "Top Layer-No Net" (solid, pour order 1000): 5906.21,4844.02 5904.21,4844.02 5802.21,4946.02 6010.21,4946.02
OUT_Row5 on Bottom Layer "Top Layer-No Net" (solid, pour order 1000): 6496.76,4844.02 6494.76,4844.02 6392.76,4946.02 6600.76,4946.02
OUT_Row5 on Bottom Layer "Top Layer-No Net" (solid, pour order 1000): 7087.31,4844.02 7085.31,4844.02 6983.31,4946.02 7191.31,4946.02
OUT_Row5 on Bottom Layer "Top Layer-No Net" (solid, pour order 1000): 7677.86,4844.02 7675.86,4844.02 7573.86,4946.02 7781.86,4946.02
OUT_Row5 on Bottom Layer "Top Layer-No Net" (solid, pour order 1000): 8268.41,4844.02 8266.41,4844.02 8164.41,4946.02 8372.41,4946.02
OUT_Row5 on Bottom Layer "Top Layer-No Net" (solid, pour order 1000): 8858.96,4844.02 8856.96,4844.02 8754.96,4946.02 8962.96,4946.02
OUT_Row5 on Bottom Layer "Top Layer-No Net" (solid, pour order 1000): 9449.51,4844.02 9447.51,4844.02 9345.51,4946.02 9553.51,4946.02
OUT_Row5 on Bottom Layer "Top Layer-No Net" (solid, pour order 1000): 10040.07,4844.02 10038.07,4844.02 9936.07,4946.02 10144.07,4946.02
OUT_Row5 on Bottom Layer "Top Layer-No Net" (solid, pour order 1000): 10630.62,4844.02 10628.62,4844.02 10526.62,4946.02 10734.62,4946.02
OUT_Row5 on Bottom Layer "Top Layer-No Net" (solid, pour order 1000): 11221.17,4844.02 11219.17,4844.02 11117.17,4946.02 11325.17,4946.02
OUT_Row5 on Bottom Layer "Top Layer-No Net" (solid, pour order 1000): 11811.72,4844.02 11809.72,4844.02 11707.72,4946.02 11915.72,4946.02
OUT_Row5 on Bottom Layer "Top Layer-No Net" (solid, pour order 1000): 12402.27,4844.02 12400.27,4844.02 12298.27,4946.02 12506.27,4946.02
OUT_Row5 on Bottom Layer "Top Layer-No Net" (solid, pour order 1000): 12992.82,4844.02 12990.82,4844.02 12888.82,4946.02 13096.82,4946.02
OUT_Row5 on Bottom Layer "Top Layer-No Net" (solid, pour order 1000): 13583.37,4844.02 13581.37,4844.02 13479.37,4946.02 13687.37,4946.02
OUT_Row5 on Bottom Layer "Top Layer-No Net" (solid, pour order 1000): 14173.92,4844.02 14171.92,4844.02 14069.92,4946.02 14277.92,4946.02
OUT_Row5 on Bottom Layer "Top Layer-No Net" (solid, pour order 1000): 14764.47,4844.02 14762.47,4844.02 14660.47,4946.02 14868.47,4946.02
OUT_Row7 on Bottom Layer "Top Layer-No Net" (solid, pour order 1000): 1772.35,6025.12 1770.35,6025.12 1668.35,6127.12 1876.35,6127.12
OUT_Row7 on Bottom Layer "Top Layer-No Net" (solid, pour order 1000): 2362.9,6025.12 2360.9,6025.12 2258.9,6127.12 2466.9,6127.12
OUT_Row7 on Bottom Layer "Top Layer-No Net" (solid, pour order 1000): 2953.45,6025.12 2951.45,6025.12 2849.45,6127.12 3057.45,6127.12
OUT_Row7 on Bottom Layer "Top Layer-No Net" (solid, pour order 1000): 3544,6025.12 3542,6025.12 3440,6127.12 3648,6127.12
OUT_Row7 on Bottom Layer "Top Layer-No Net" (solid, pour order 1000): 4134.55,6025.12 4132.55,6025.12 4030.55,6127.12 4238.55,6127.12
OUT_Row7 on Bottom Layer "Top Layer-No Net" (solid, pour order 1000): 4725.1,6025.12 4723.1,6025.12 4621.1,6127.12 4829.1,6127.12
OUT_Row7 on Bottom Layer "Top Layer-No Net" (solid, pour order 1000): 5315.66,6025.12 5313.66,6025.12 5211.66,6127.12 5419.66,6127.12
OUT_Row7 on Bottom Layer "Top Layer-No Net" (solid, pour order 1000): 5906.21,6025.12 5904.21,6025.12 5802.21,6127.12 6010.21,6127.12
OUT_Row7 on Bottom Layer "Top Layer-No Net" (solid, pour order 1000): 6496.76,6025.12 6494.76,6025.12 6392.76,6127.12 6600.76,6127.12
OUT_Row7 on Bottom Layer "Top Layer-No Net" (solid, pour order 1000): 7087.31,6025.12 7085.31,6025.12 6983.31,6127.12 7191.31,6127.12
OUT_Row7 on Bottom Layer "Top Layer-No Net" (solid, pour order 1000): 7677.86,6025.12 7675.86,6025.12 7573.86,6127.12 7781.86,6127.12
OUT_Row7 on Bottom Layer "Top Layer-No Net" (solid, pour order 1000): 8268.41,6025.12 8266.41,6025.12 8164.41,6127.12 8372.41,6127.12
OUT_Row7 on Bottom Layer "Top Layer-No Net" (solid, pour order 1000): 8858.96,6025.12 8856.96,6025.12 8754.96,6127.12 8962.96,6127.12
OUT_Row7 on Bottom Layer "Top Layer-No Net" (solid, pour order 1000): 9449.51,6025.12 9447.51,6025.12 9345.51,6127.12 9553.51,6127.12
OUT_Row7 on Bottom Layer "Top Layer-No Net" (solid, pour order 1000): 10040.07,6025.12 10038.07,6025.12 9936.07,6127.12 10144.07,6127.12
OUT_Row7 on Bottom Layer "Top Layer-No Net" (solid, pour order 1000): 10630.62,6025.12 10628.62,6025.12 10526.62,6127.12 10734.62,6127.12
OUT_Row7 on Bottom Layer "Top Layer-No Net" (solid, pour order 1000): 11221.17,6025.12 11219.17,6025.12 11117.17,6127.12 11325.17,6127.12
OUT_Row7 on Bottom Layer "Top Layer-No Net" (solid, pour order 1000): 11811.72,6025.12 11809.72,6025.12 11707.72,6127.12 11915.72,6127.12
OUT_Row7 on Bottom Layer "Top Layer-No Net" (solid, pour order 1000): 12402.27,6025.12 12400.27,6025.12 12298.27,6127.12 12506.27,6127.12
OUT_Row7 on Bottom Layer "Top Layer-No Net" (solid, pour order 1000): 12992.82,6025.12 12990.82,6025.12 12888.82,6127.12 13096.82,6127.12
OUT_Row7 on Bottom Layer "Top Layer-No Net" (solid, pour order 1000): 13583.37,6025.12 13581.37,6025.12 13479.37,6127.12 13687.37,6127.12
OUT_Row7 on Bottom Layer "Top Layer-No Net" (solid, pour order 1000): 14173.92,6025.12 14171.92,6025.12 14069.92,6127.12 14277.92,6127.12
OUT_Row7 on Bottom Layer "Top Layer-No Net" (solid, pour order 1000): 14764.47,6025.12 14762.47,6025.12 14660.47,6127.12 14868.47,6127.12
OUT_Row6 on Bottom Layer "Top Layer-No Net" (solid, pour order 1000): 14764.48,5434.57 14762.48,5434.57 14660.48,5536.57 14868.48,5536.57
OUT_Row6 on Bottom Layer "Top Layer-No Net" (solid, pour order 1000): 14173.92,5434.57 14171.92,5434.57 14069.92,5536.57 14277.92,5536.57
OUT_Row6 on Bottom Layer "Top Layer-No Net" (solid, pour order 1000): 13583.37,5434.57 13581.37,5434.57 13479.37,5536.57 13687.37,5536.57
OUT_Row6 on Bottom Layer "Top Layer-No Net" (solid, pour order 1000): 12992.82,5434.57 12990.82,5434.57 12888.82,5536.57 13096.82,5536.57
OUT_Row6 on Bottom Layer "Top Layer-No Net" (solid, pour order 1000): 12402.27,5434.57 12400.27,5434.57 12298.27,5536.57 12506.27,5536.57
OUT_Row6 on Bottom Layer "Top Layer-No Net" (solid, pour order 1000): 11811.72,5434.57 11809.72,5434.57 11707.72,5536.57 11915.72,5536.57
OUT_Row6 on Bottom Layer "Top Layer-No Net" (solid, pour order 1000): 11221.17,5434.57 11219.17,5434.57 11117.17,5536.57 11325.17,5536.57
OUT_Row6 on Bottom Layer "Top Layer-No Net" (solid, pour order 1000): 10630.62,5434.57 10628.62,5434.57 10526.62,5536.57 10734.62,5536.57
OUT_Row6 on Bottom Layer "Top Layer-No Net" (solid, pour order 1000): 10040.07,5434.57 10038.07,5434.57 9936.07,5536.57 10144.07,5536.57
OUT_Row6 on Bottom Layer "Top Layer-No Net" (solid, pour order 1000): 9449.51,5434.57 9447.51,5434.57 9345.51,5536.57 9553.51,5536.57
OUT_Row6 on Bottom Layer "Top Layer-No Net" (solid, pour order 1000): 8858.96,5434.57 8856.96,5434.57 8754.96,5536.57 8962.96,5536.57
OUT_Row6 on Bottom Layer "Top Layer-No Net" (solid, pour order 1000): 8268.41,5434.57 8266.41,5434.57 8164.41,5536.57 8372.41,5536.57
OUT_Row6 on Bottom Layer "Top Layer-No Net" (solid, pour order 1000): 7677.86,5434.57 7675.86,5434.57 7573.86,5536.57 7781.86,5536.57
OUT_Row6 on Bottom Layer "Top Layer-No Net" (solid, pour order 1000): 7087.31,5434.57 7085.31,5434.57 6983.31,5536.57 7191.31,5536.57
OUT_Row6 on Bottom Layer "Top Layer-No Net" (solid, pour order 1000): 6496.76,5434.57 6494.76,5434.57 6392.76,5536.57 6600.76,5536.57
OUT_Row6 on Bottom Layer "Top Layer-No Net" (solid, pour order 1000): 5906.21,5434.57 5904.21,5434.57 5802.21,5536.57 6010.21,5536.57
OUT_Row6 on Bottom Layer "Top Layer-No Net" (solid, pour order 1000): 5315.66,5434.57 5313.66,5434.57 5211.66,5536.57 5419.66,5536.57
OUT_Row6 on Bottom Layer "Top Layer-No Net" (solid, pour order 1000): 4725.1,5434.57 4723.1,5434.57 4621.1,5536.57 4829.1,5536.57
OUT_Row6 on Bottom Layer "Top Layer-No Net" (solid, pour order 1000): 4134.55,5434.57 4132.55,5434.57 4030.55,5536.57 4238.55,5536.57
OUT_Row6 on Bottom Layer "Top Layer-No Net" (solid, pour order 1000): 3544,5434.57 3542,5434.57 3440,5536.57 3648,5536.57
OUT_Row6 on Bottom Layer "Top Layer-No Net" (solid, pour order 1000): 2953.45,5434.57 2951.45,5434.57 2849.45,5536.57 3057.45,5536.57
OUT_Row6 on Bottom Layer "Top Layer-No Net" (solid, pour order 1000): 2362.9,5434.57 2360.9,5434.57 2258.9,5536.57 2466.9,5536.57
OUT_Row6 on Bottom Layer "Top Layer-No Net" (solid, pour order 1000): 1772.35,5434.57 1770.35,5434.57 1668.35,5536.57 1876.35,5536.57

## Silkscreen, mask and mechanical layers (free items; w line width, h text height)
Top Overlay:
  lines w10: 27,721 17985,721 ; 555,7235 17950,7235 ; 690,610 690,7355 ; 15515.71,3312.05 15580.71,3312.05 ; 15515.71,3707.05 15580.71,3707.05 ; 15535.71,3282.05 15535.71,3347.05 ; 15535.71,3377.05 15535.71,3442.05 ; 15535.71,3472.05 15535.71,3537.05 ; 15535.71,3562.05 15535.71,3627.05 ; 15535.71,3657.05 15535.71,3722.05 ; 15545.71,5947.05 15610.71,5947.05 ; 15550.71,5477.05 15615.71,5477.05 ; 15570.71,5447.05 15570.71,5512.05 ; 15570.71,5542.05 15570.71,5607.05 ; 15570.71,5637.05 15570.71,5702.05 ; 15570.71,5727.05 15570.71,5792.05 ; 15570.71,5822.05 15570.71,5887.05 ; 15570.71,5912.05 15570.71,5977.05 ; 15605.71,3312.05 15670.71,3312.05 ; 15605.71,3707.05 15670.71,3707.05 ; 15605.71,3767.05 15605.71,4042.05 15700.71,4042.05 15700.71,3767.05 ; 15630.71,5947.05 15695.71,5947.05 ; 15640.71,5477.05 15705.71,5477.05 ; 15700.71,3312.05 15765.71,3312.05 ; 15700.71,3707.05 15765.71,3707.05 ; 15725.71,5947.05 15790.71,5947.05 ; 15735.71,5477.05 15800.71,5477.05 ; 15795.71,3312.05 15860.71,3312.05 ; 15795.71,3707.05 15860.71,3707.05 ; 15820.71,5947.05 15885.71,5947.05 ; 15825.71,3282.05 15825.71,3347.05 ; 15825.71,3377.05 15825.71,3442.05 ; 15825.71,3472.05 15825.71,3537.05 ; 15825.71,3562.05 15825.71,3627.05 ; 15825.71,3657.05 15825.71,3722.05 ; 15830.71,5477.05 15895.71,5477.05 ; 15860.71,5447.05 15860.71,5512.05 ; 15860.71,5542.05 15860.71,5607.05 ; 15860.71,5637.05 15860.71,5702.05 ; 15860.71,5727.05 15860.71,5792.05 ; 15860.71,5822.05 15860.71,5887.05 ; 15860.71,5912.05 15860.71,5977.05 ; 16100.71,3767.05 16100.71,4042.05 16195.71,4042.05 16195.71,3767.05 ; 16710.71,2312.05 16710.71,2147.05 17010.71,2147.05 17010.71,2312.05 ; 16710.71,2537.05 16710.71,2702.05 17010.71,2702.05 17010.71,2537.05 ; 16810.71,2147.05 16810.71,2312.05 ; 16815.71,2537.05 16815.71,2702.05 ; 16905.71,2147.05 16905.71,2312.05 ; 16910.71,2537.05 16910.71,2702.05 ; 17891,650 17891,7300
  text "GND" at 15600.71,5872.05 h60
  text "+5.0V" at 15715.71,5872.05 h60
  text "RX" at 15620.71,3782.05 h60
  text "TX" at 16115.71,3782.05 h60
  text "Keep Alive" at 15570.71,3637.05 h60 r270
  text "VTG" at 16775.71,2572.53 h60 r90
  text "GND" at 16972.71,2569.02 h60 r90
  text "MOSI" at 16874.21,2553.05 h60 r90
  text "MISO" at 16775.71,2184.05 h60 r90
  text "SCK" at 16874.21,2184.05 h60 r90
  text "RST" at 16972.71,2184.05 h60 r90
  text "ISP6PIN" at 16723.71,2095.05 h60

## Text inside footprints (layer, text, board x,y; h text height)
C10: Top Overlay "+" at 16515.71,6372.05 h98.43 r270
C11: Top Overlay "+" at 15715.71,6372.05 h98.43 r270
D13: Top Overlay "~" at 16670.71,5607.05 h60 r90; Top Overlay "~" at 16775.71,5607.05 h60 r90; Top Overlay "+" at 16670.71,5707.05 h60 r90; Top Overlay "-" at 16780.71,5712.05 h60 r90
P1: Top Overlay "1" at 16680.71,2355.51 h50; Top Overlay "2" at 16660.71,2455.51 h50; Top Overlay "5" at 17020.71,2355.51 h50; Top Overlay "6" at 17020.71,2455.51 h50